# Altium PCB PCB1.PcbDoc
Units mm, origin at the board's own origin, x right, y up, seen from the top; angles counter-clockwise.
Board outline 43.43 x 31.75 mm, 2 copper layers (Top Layer, Bottom Layer), stack 1.569 mm thick; 12 components, 13 nets, 71 pads, 0 vias.
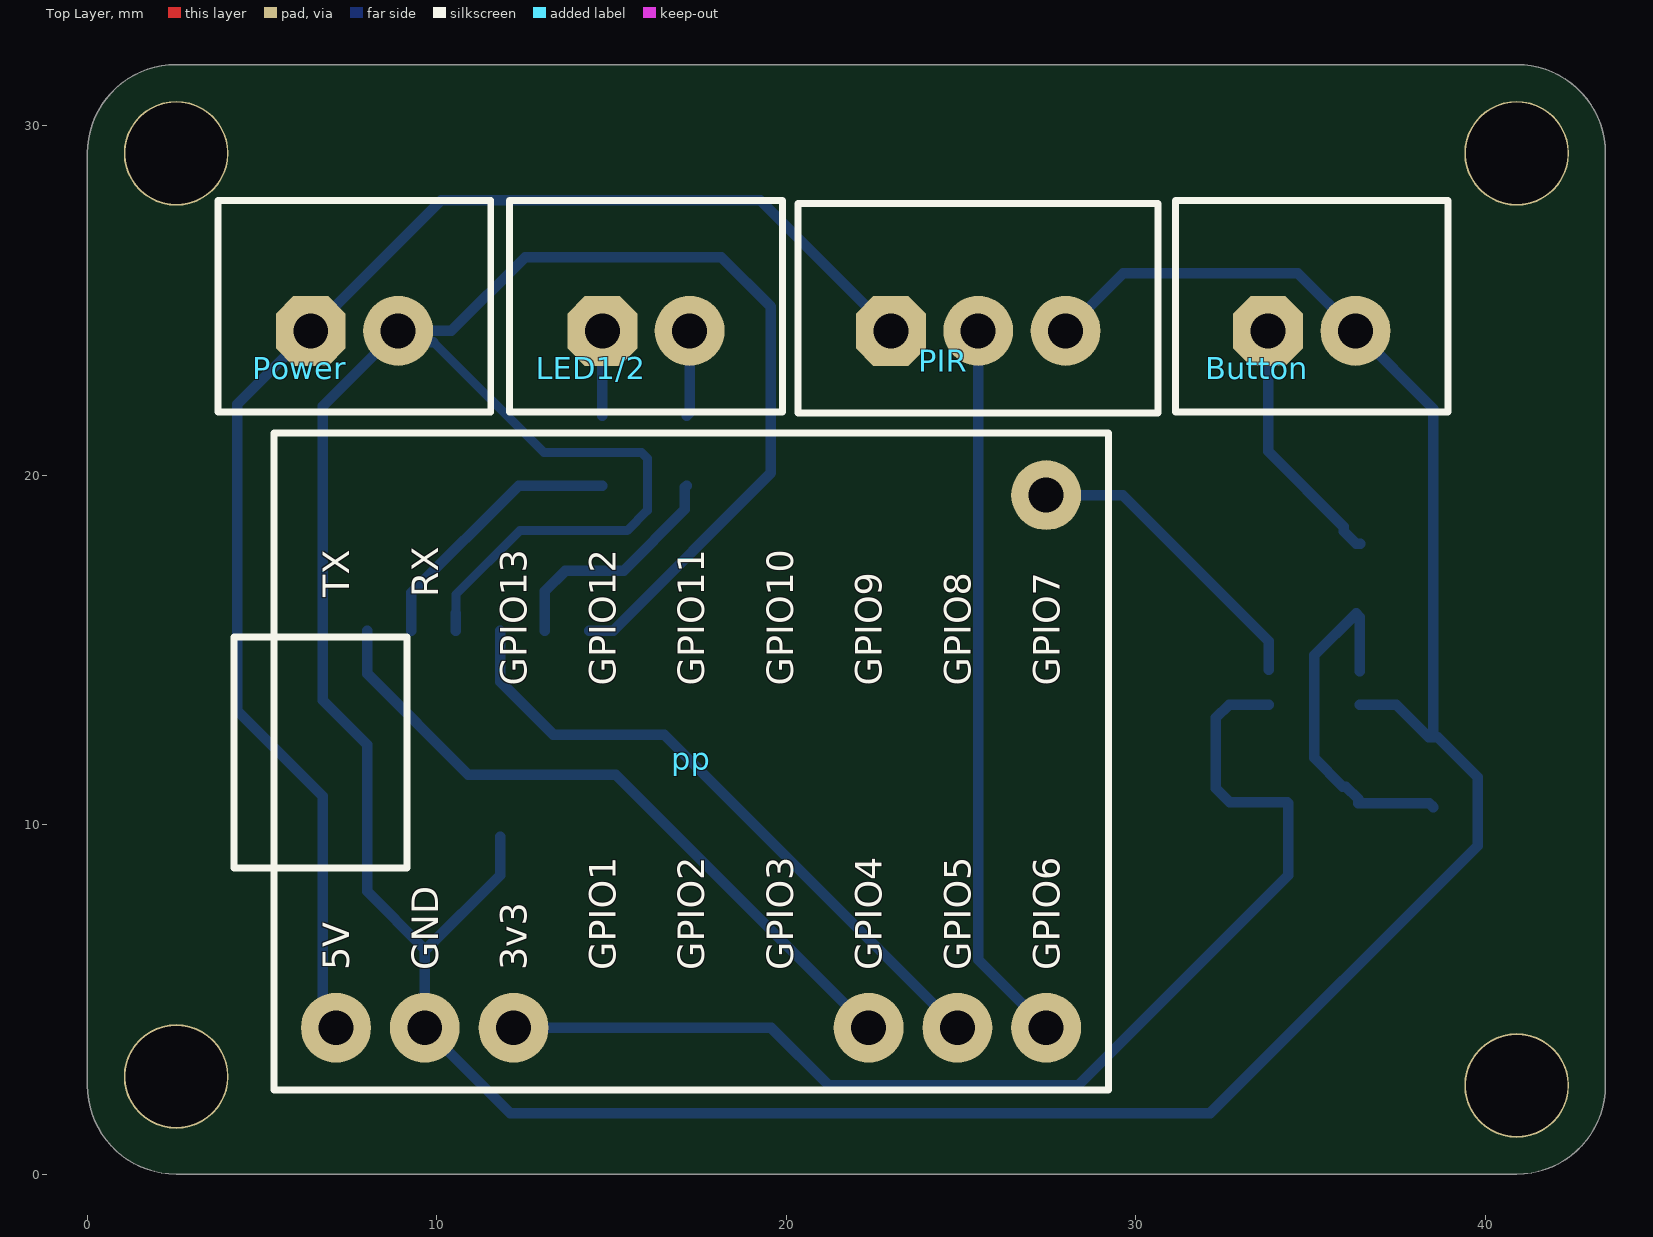
[diagram p0: Top Layer view]
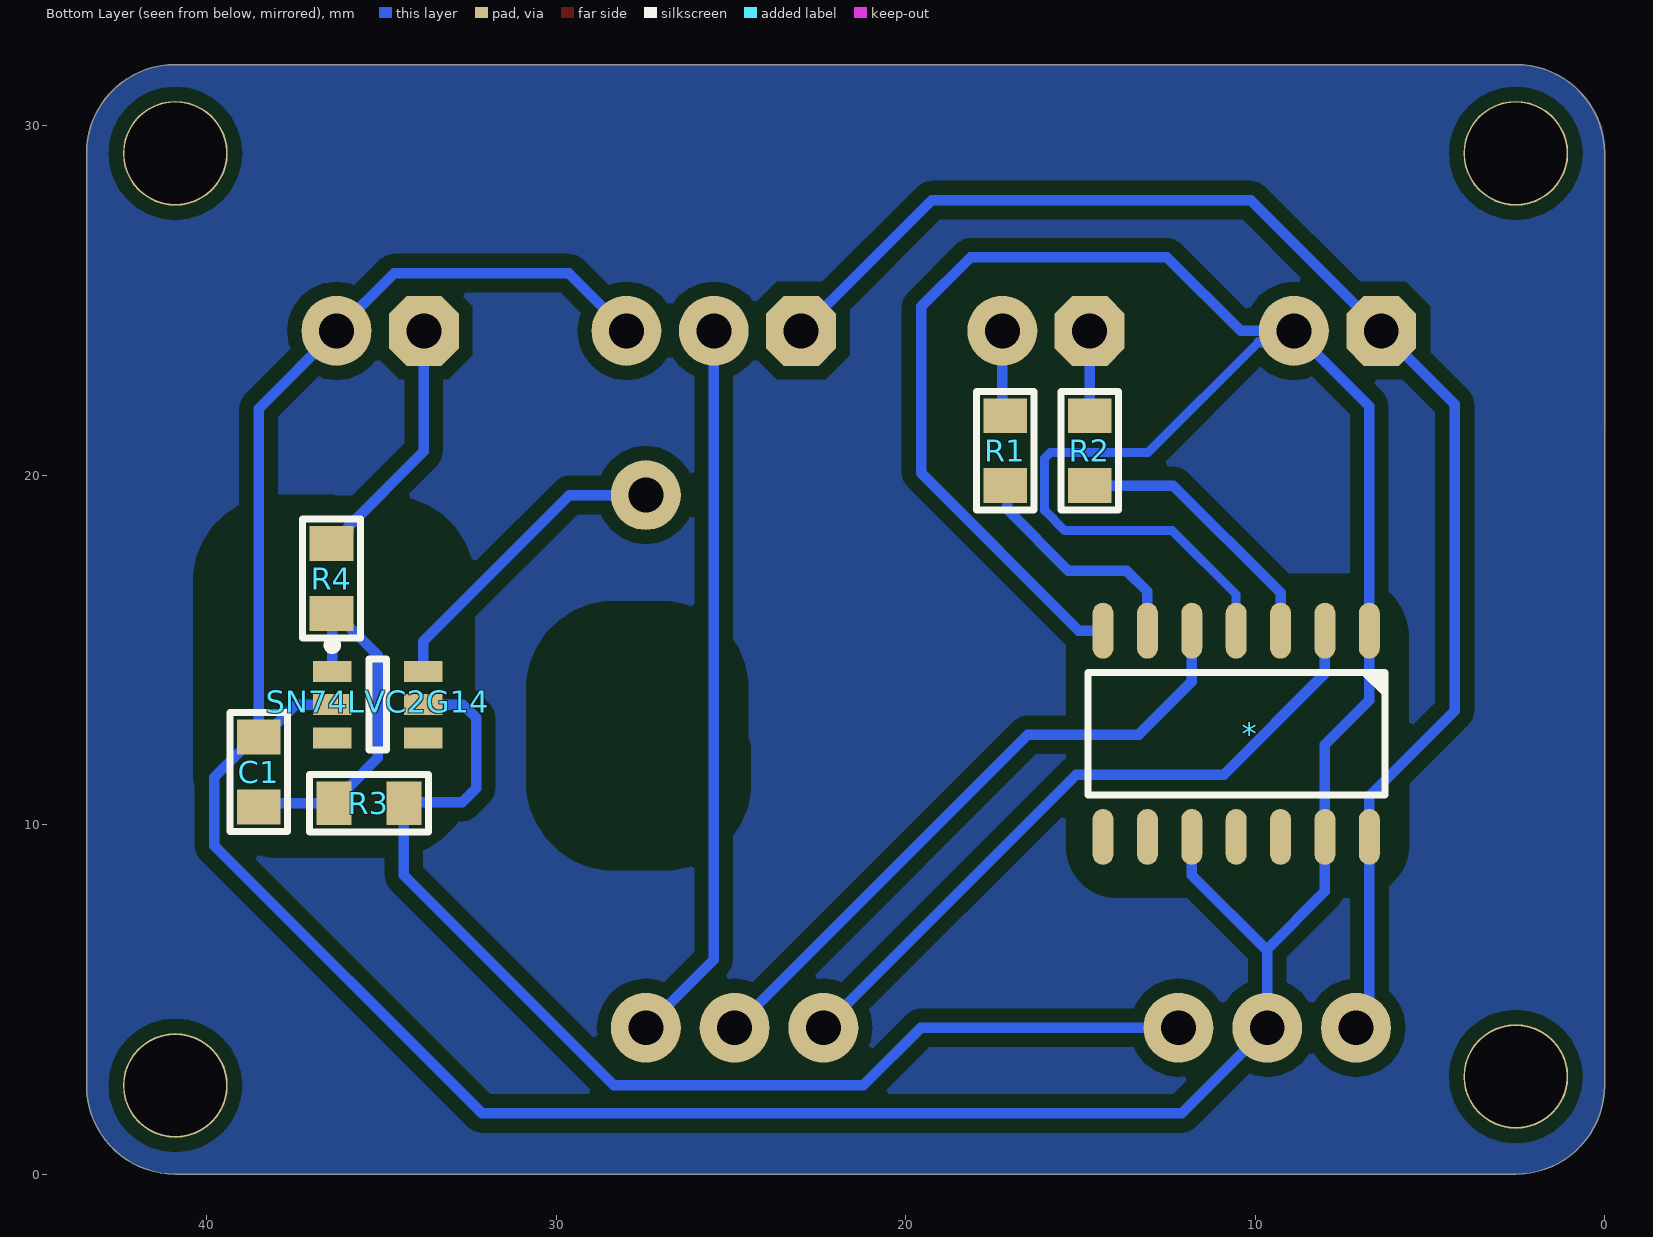
[diagram p1: Bottom Layer view, seen from below]
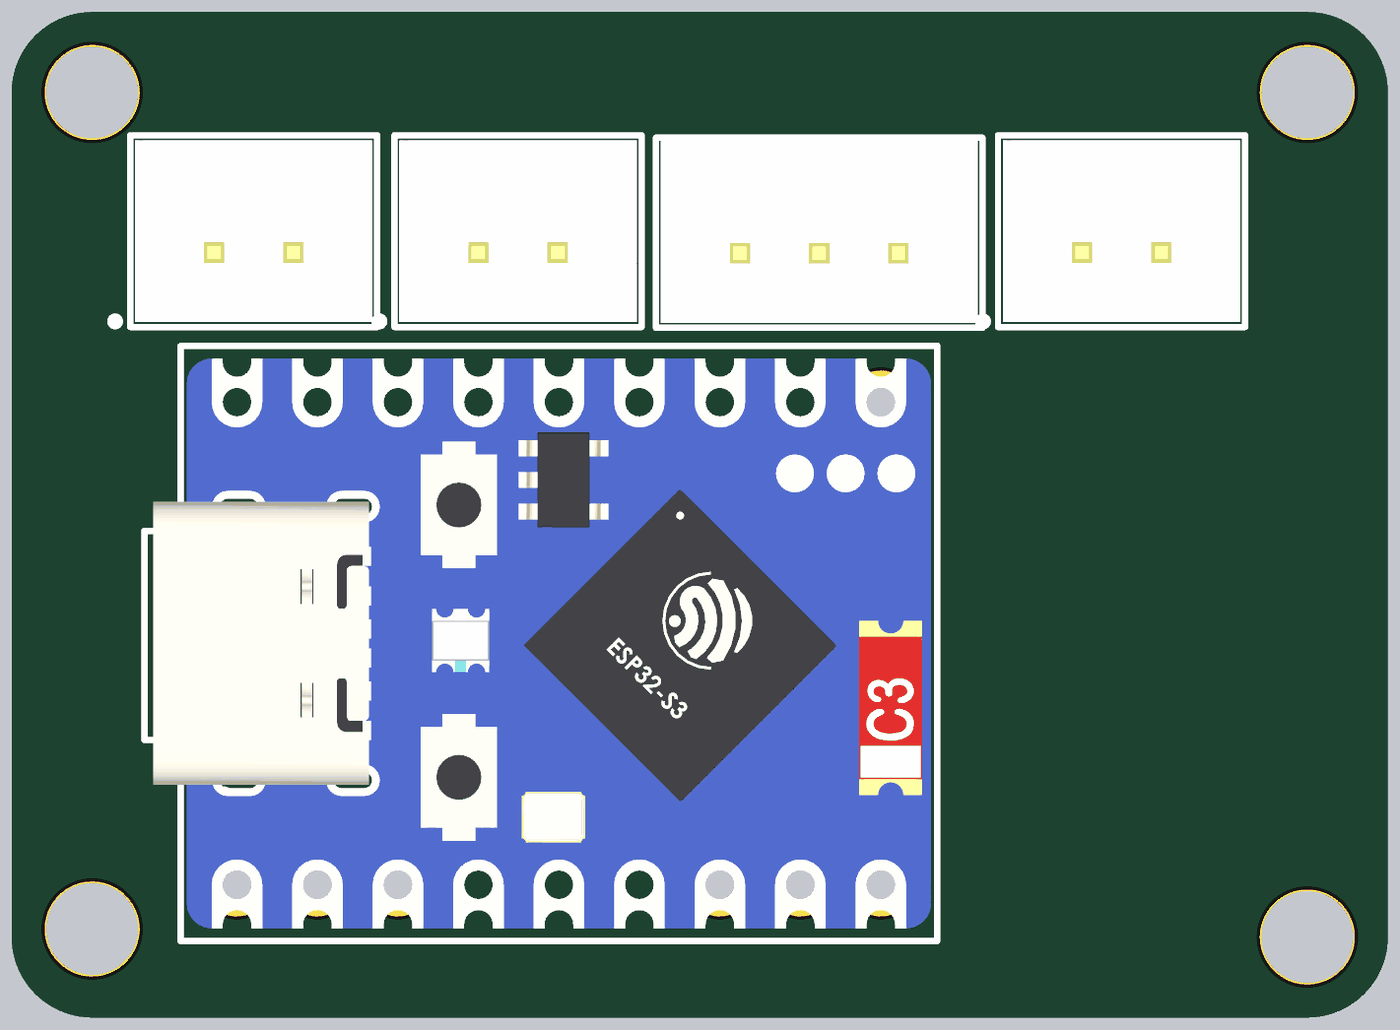
[diagram p2: 3D render of the assembled board from above, using the file's embedded part models]
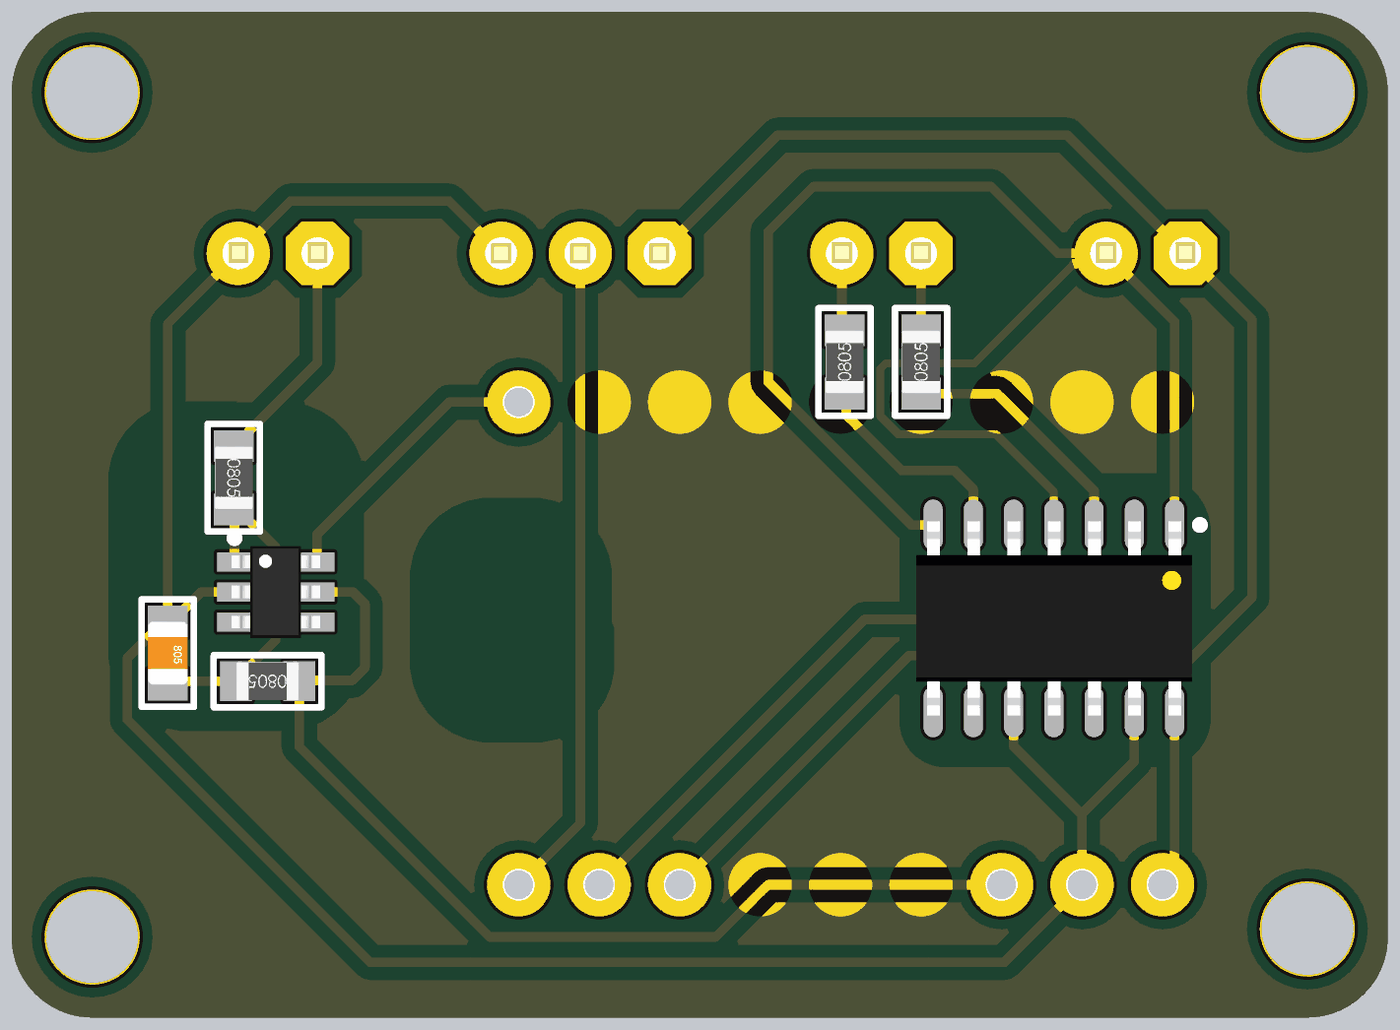
[diagram p3: 3D render of the assembled board from below, using the file's embedded part models]

## Layer stack, top to bottom
Top Solder: solder mask 0.0254, SM-001, Dk 4
Top Layer: signal copper 0.035
Dielectric 1: core 1.4986, Core-043, Dk 4.3
Bottom Layer: signal copper 0.035
Bottom Solder: solder mask 0.0254, SM-001, Dk 4

## Board outline
0,2.54 0,29.21 cw(c2.54,29.21) 2.54,31.75 40.894,31.75 cw(c40.894,29.21) 43.434,29.21 43.434,2.54 cw(c40.894,2.54) 40.894,0 2.54,0 cw(c2.54,2.54)

## Design rules (kind name [scope] priority, off if disabled: settings)
Clearance [All] p1: gap=0.4 ignorepadtopadclearanceinfootprint=FALSE except(0.3: Arc-SMDPad Track-SMDPad SMDPad-SMDPad)
PlaneConnect [All] p1: planeconnectstyle=Relief reliefexpansion=0.508 reliefentries=4 reliefconductorwidth=0.4 reliefairgap=0.4
PolygonConnect [All] p1: connectstyle=Relief reliefconductorwidth=0.3 reliefentries=2 polygonreliefangle="90 Angle" airgapwidth=0.4
RoutingVias [All] p1: holewidth=0.711 width=1.27 viastyle="Through Hole" minholewidth=0.711 minwidth=1.27 maxholewidth=0.711 maxwidth=1.27
SolderMaskExpansion [All] p1: expansion=0.102 istentingtop=FALSE
Width [All] p1: maxlimit=1 minlimit=0.254 preferedwidth=0.254
29 further rules are at their usual default settings.

## Components (designator, comment, footprint, x,y, rotation, side; value= is the part's Value field where it differs from the comment)
* "SN74AHCT125DR" 14-SOIC 6.731,15.552 r270 bottom
Button "Connector, 2pin, 2.54mm, 250VAC, 3A" "CON: CWF-2" 35.032,24.13 r0 top
C1 "Ceramic capacitor, 50μF, X7R, ±10%, 16V, 0805, -55...+125°C" "CAP: 0805" 38.506,11.506 r270 bottom value=50μF
LED1/2 "Connector, 2pin, 2.54mm, 250VAC, 3A" "CON: CWF-2" 15.982,24.13 r0 top
PIR "Connector, 2pin, 2.54mm, 250VAC, 3A" "CON: CWF-3" 25.487,24.13 r0 top
Power "Connector, 2pin, 2.54mm, 250VAC, 3A" "CON: CWF-2" 7.64,24.13 r0 top
pp "ESP32 S3 Zero" "ESP32 S3 Zero" 17.272,11.811 r90 top
R1 "Resistor film, 400, ±5%, 0805, 0.125W, -55...+125°C" "RES: 0805" 17.145,20.701 r90 bottom value=400
R2 "Resistor film, 400, ±5%, 0805, 0.125W, -55...+125°C" "RES: 0805" 14.732,20.701 r90 bottom value=400
R3 "Resistor film, 104, ±5%, 0805, 0.125W, -55...+125°C" "RES: 0805" 35.357,10.617 r0 bottom value=104
R4 "Resistor film, 100, ±5%, 0805, 0.125W, -55...+125°C" "RES: 0805" 36.424,17.043 r270 bottom value=100
SN74LVC2G14 "Dual Schmitt-Trigger Inverter" SOT23-6 35.103,13.437 r180 bottom

## Footprints (in the part's own frame and the unit in brackets; to place one, negate y for a bottom-side part, rotate by r counter-clockwise, add the part's x,y. Pads: shape width x height; smd on the part's side, far side on the other; paste and mask are expansions set on the pad)
14-SOIC [mm] "pitch 1.27 mm"
  rrect100% 1.6x0.6 smd: 1(0,0) 2(0,-1.27) 3(0,-2.54) 4(0,-3.81) 5(0,-5.08) 6(0,-6.35) 7(0,-7.62) 8(5.9,-7.62) 9(5.9,-6.35) 10(5.9,-5.08) 11(5.9,-3.81) 12(5.9,-2.54) 13(5.9,-1.27) 14(5.9,0)
  rrect100% 0.5x0.5 on Bottom Overlay: ""(0,0.8)
  round 0.5 on Mech1: ""(0.5,0)
  silkscreen extent 1.2,-8.05 4.7,0.45, body extent -0.12,-8.15 6.02,0.55, height 1.78
"CAP: 0805" [mm]
  rect 1x1.25 smd: 1(-1,0) 2(1,0)
  silkscreen extent -1.7,-0.82 1.7,0.82, body extent -1,-0.62 1,0.63, height 0.78
"CON: CWF-2" [mm]
  oct 2x2 hole 1: 1(-1.25,0)
  round 2 hole 1: 2(1.25,0)
  round 0.5 on Top Overlay: ""(-4.375,-2.15)
  round 0.5 on Mech1: ""(-3.2,-1.7)
  silkscreen extent -3.9,-2.32 3.9,3.72, body extent -3.75,-2.18 3.75,3.57, height 7
"CON: CWF-3" [mm]
  oct 2x2 hole 1: 1(-2.5,0)
  round 2 hole 1: 2(0,0) 3(2.5,0)
  round 0.5 on Mech1: ""(-4.5,-1.7)
  silkscreen extent -5.15,-2.35 5.15,3.65, body extent -5,-2.2 5,3.55, height 7
"ESP32 S3 Zero" [mm]
  round 2 on Bottom Solder: 1(-7.62,2.54) 2(-7.62,0) 3(-7.62,-2.54) 8(7.62,-7.62) 9(7.62,-5.08) 10(7.62,-2.54) 11(7.62,0) 12(7.62,2.54) 13(7.62,5.08) 17(7.62,7.62) 18(7.62,10.16)
  round 2 hole 1: 4(-7.62,-5.08) 5(-7.62,-7.62) 6(-7.62,-10.16) 7(7.62,-10.16) 14(-7.62,10.16) 15(-7.62,7.62) 16(-7.62,5.08)
  silkscreen extent -9.4,-11.94 9.4,13.08, body extent -9,-11.75 9,12.8, height 5.31
"RES: 0805" [mm]
  rect 1x1.25 smd: 1(-1,0) 2(1,0)
  silkscreen extent -1.7,-0.82 1.7,0.82, body extent -1,-0.6 1,0.6, height 0.44
SOT23-6 [mm] "pitch 0.95 mm"
  rect 1.1x0.6 smd: 1(-1.3,0.95) 2(-1.3,0) 3(-1.3,-0.95) 4(1.3,-0.95) 5(1.3,0) 6(1.3,0.95)
  round 0.5 on Mech1: ""(-1,1.1)
  silkscreen extent -1.43,-1.3 0.25,1.82, body extent -1.4,-1.45 1.4,1.45, height 1.45

## Part data
Button LED1/2 Power: library part CWF-2, CurrentMax=3A, Manufacturer=Connfly, PartNumber=CWF-2R, VoltageMax=250VAC, CommentText="\"Разъем\"", HelpURL=https://www.chipdip.ru/product/cwf-2r-ds1069-2-mr, Multichannel=2pin, Pitch=2.54mm, TypeConnector=Connector, ValueManufacturerPartNumber="Connector, 2pin, 2.54mm, 250VAC, 3A"
C1: library part Ceramic_0805, Manufacturer=Yageo, Package=0805, PartNumber=CC0805KRX7R7BB104, Temperature=-55...+125°C, Tolerance=±10%, TypeCapacitor="Ceramic capacitor", TypeDielectric=X7R, Voltage=16V, HelpURL=https://www.digikey.com/product-detail/en/yageo/CC0805KRX7R7BB104/311-1142-1-ND/303052, ValueManufacturerPartNumber="Ceramic capacitor, 50μF, X7R, ±10%, 16V, 0805, -55...+125°C"
PIR: library part CWF-3, CurrentMax=3A, Manufacturer=Connfly, PartNumber=CWF-2R, VoltageMax=250VAC, CommentText="\"Разъем\"", HelpURL=https://www.chipdip.ru/product/cwf-2r-ds1069-2-mr, Multichannel=2pin, Pitch=2.54mm, TypeConnector=Connector, ValueManufacturerPartNumber="Connector, 2pin, 2.54mm, 250VAC, 3A"
R1 R2 R3 R4: library part Resistor_0805, Manufacturer=Yageo, Package=0805, PartNumber=RC0805JR-07100RL, Power=0.125W, Temperature=-55...+125°C, Tolerance=±5%, TypeResistor="Resistor film", HelpURL=https://www.digikey.com/product-detail/en/yageo/RC0805JR-07100RL/311-100ARCT-ND/731185
  R1 R2: ValueManufacturerPartNumber="Resistor film, 400, ±5%, 0805, 0.125W, -55...+125°C"
  R3: ValueManufacturerPartNumber="Resistor film, 104, ±5%, 0805, 0.125W, -55...+125°C"
  R4: ValueManufacturerPartNumber="Resistor film, 100, ±5%, 0805, 0.125W, -55...+125°C"
SN74LVC2G14: library part SN74LVC2G14DBVR, "Invertor"

## Free pads (board coordinates)
  round 3 hole 2.9: 7(2.54,29.21) 8(40.894,29.21) 9(2.54,2.794) 10(40.894,2.54)

## Nets (pads, with @x,y where several pads share a name; then routed paths per layer and width w, separated by ;. In a path a pad name is that pad's centre, name@x,y a point inside that pad or via, vN(x,y) a via of type N, cw(c..) or ccw(c..) an arc to the next point about the centre after c; other vN are vias at no path point)
1A: *.2 pp.4 | length 19.8
  Bottom Layer w0.3: *.2 8.001,14.326 10.897,11.43 15.113,11.43 pp.4
1Y: *.3 R2.1 | length 7.8
  Bottom Layer w0.3: *.3 9.271,16.637 12.335,19.701 R2.1
1Y_6: pp.7 SN74LVC2G14.6 | length 8.9
  Bottom Layer w0.3: pp.7 29.616,19.431 33.803,15.245 SN74LVC2G14.6@33.803,14.437
2A: *.5 pp.5 | length 18.6
  Bottom Layer w0.3: *.5 11.811,14.097 13.335,12.573 16.51,12.573 pp.5
2Y: *.6 R1.1 | length 6.8
  Bottom Layer w0.3: *.6 13.081,16.675 13.678,17.272 15.342,17.272 17.094,19.025 17.094,19.65 R1.1
3v3: pp.16 R3.1 SN74LVC2G14.5 | length 33.3
  Bottom Layer w0.3: pp.16 19.559,4.191 21.209,2.541 28.347,2.541 34.357,8.55 R3.1 34.331,10.643 32.69,10.643 32.283,11.049 32.283,13.056 32.664,13.437 SN74LVC2G14.5
+5: *.14 PIR.1 Power.1 pp.14 | length 41.7
  Bottom Layer w0.3: pp.14 7.112,4.624 6.731,5.005 6.731,10.82 4.293,13.259 4.293,22.033 Power.1 10.124,27.864 19.253,27.864 PIR.1
Button: Button.1 R4.1 | length 7.3
  Bottom Layer w0.3: Button.1 33.782,20.685 35.949,18.518 35.949,18.393 36.299,18.043 R4.1
GND: *.1 *.4 *.7 *.10 *.13 Button.2 C1.1 PIR.3 Power.2 pp.15 SN74LVC2G14.2 | length 129.9
  Bottom Layer w0.254: 9.901,23.805 13.055,20.651 15.849,20.651 16.02,20.48 16.02,18.992 15.443,18.415 12.37,18.415 10.541,16.586 *.4@10.541,16.052
  Bottom Layer w0.3: 9.652,6.401 11.811,8.56 *.10 ; 9.901,23.805 9.675,23.805 9.576,23.904 Power.2@9.576,24.13 ; *.4 *.4@10.541,16.052 ; *.7 15.04,15.552 19.558,20.07 19.558,24.816 18.136,26.238 12.522,26.238 10.414,24.13 Power.2@9.576,24.13 ; PIR.3 29.637,25.78 34.632,25.78 Button.2 38.506,21.906 C1.1 ; SN74LVC2G14.2 37.451,13.437 38.381,12.506 C1.1 ; Power.2@9.576,24.13 Power.2 6.731,21.971 *.1 6.731,13.564 8.001,12.294 *.13 8.001,8.091 9.652,6.44 pp.15 12.102,1.741 32.119,1.741 39.781,9.403 39.781,11.356 38.631,12.506 C1.1
NetC1_2: C1.2 R3.2 R4.2 SN74LVC2G14.1 | length 10.4
  Bottom Layer w0.3: SN74LVC2G14.1 36.403,15.939 36.299,16.043 35.103,14.848 35.103,11.913 35.923,11.092 36.007,11.092 36.357,10.742 R3.2 38.395,10.617 C1.2
NetLED1/2_1: LED1/2.1 R2.2 | length 2.4
  Bottom Layer w0.3: R2.2 LED1/2.1
NetLED1/2_2: LED1/2.2 R1.2 | length 2.5
  Bottom Layer w0.3: R1.2 17.232,21.788 LED1/2.2
PIR: PIR.2 pp.6 | length 20.7
  Bottom Layer w0.3: PIR.2 25.487,6.136 pp.6
pads on no net: *. *.8 *.9 *.11 *.12 Button. LED1/2. PIR. Power. pp.1 pp.2 pp.3 pp.8 pp.9 pp.10 pp.11 pp.12 pp.13 pp.17 pp.18 SN74LVC2G14. SN74LVC2G14.3 SN74LVC2G14.4

## Polygon pours and split planes (outlines as drawn)
no net on Bottom Layer "NONET_L02_P000" (solid, pour order 0): -0.025,28.956 -0.025,29.21 cw(c2.515,29.21) 2.515,31.75 40.894,31.75 cw(c40.894,29.21) 43.434,29.21 43.434,2.54 cw(c40.894,2.54) 40.894,0 2.54,0 cw(c2.54,2.54) 0,2.54 0,13.767

## Other copper
Bottom Layer:
  pour cut-out: 36.373,19.431 34.849,19.431 ccw(c34.849,16.891) 32.309,16.891 32.309,11.582 ccw(c34.849,11.582) 34.849,9.042 37.846,9.042 ccw(c37.846,11.582) 40.386,11.582 40.386,16.916 ccw(c37.846,16.916) 37.846,19.456 36.322,19.456
  pour cut-out: 14.453,25.933 12.548,25.705 10.693,24.079 12.446,21.615 15.469,20.879 17.577,20.269 18.71,20.015 19.38,20.676 19.38,24.282 18.847,25.527 15.088,25.933
  pour cut-out: 24.486,12.471 24.486,13.868 cw(c27.026,13.868) 27.026,16.408 28.321,16.408 cw(c28.321,13.868) 30.861,13.868 30.861,11.227 cw(c28.321,11.227) 28.321,8.687 26.949,8.687 cw(c26.949,11.227) 24.409,11.227 24.409,12.294
  pour cut-out: 5.588,15.316 cw(c7.468,15.316) 7.468,17.196 13.106,17.196 cw(c13.106,14.884) 15.418,14.884 15.418,9.373 cw(c13.945,9.373) 13.945,7.899 7.163,7.899 cw(c7.163,9.474) 5.588,9.474

## Silkscreen, mask and mechanical layers (free items; w line width, h text height)
Border:
  the board outline again, w0.1

## Text inside footprints (layer, text, board x,y; h text height)
pp: Top Overlay "GPIO5" at 25.273,5.842 h0.76 r90; Top Overlay "GPIO1" at 15.113,5.842 h0.76 r90; Top Overlay "GPIO2" at 17.653,5.842 h0.76 r90; Top Overlay "GPIO3" at 20.193,5.842 h0.76 r90; Top Overlay "GPIO4" at 22.733,5.842 h0.76 r90; Top Overlay "3v3" at 12.573,5.842 h0.76 r90; Top Overlay "GND" at 10.033,5.842 h0.76 r90; Top Overlay "5V" at 7.493,5.842 h0.76 r90; Top Overlay "GPIO13" at 12.573,13.97 h0.76 r90; Top Overlay "GPIO11" at 17.653,13.97 h0.76 r90; Top Overlay "GPIO10" at 20.193,13.97 h0.76 r90; Top Overlay "GPIO9" at 22.733,13.97 h0.76 r90; Top Overlay "GPIO8" at 25.273,13.97 h0.76 r90; Top Overlay "GPIO7" at 27.813,13.97 h0.76 r90; Top Overlay "GPIO6" at 27.813,5.842 h0.76 r90; Top Overlay "GPIO12" at 15.113,13.97 h0.76 r90; Top Overlay "RX" at 10.033,16.51 h0.76 r90; Top Overlay "TX" at 7.493,16.51 h0.76 r90